# EAGLE board P2H-001 (EAGLE 7.1.0)
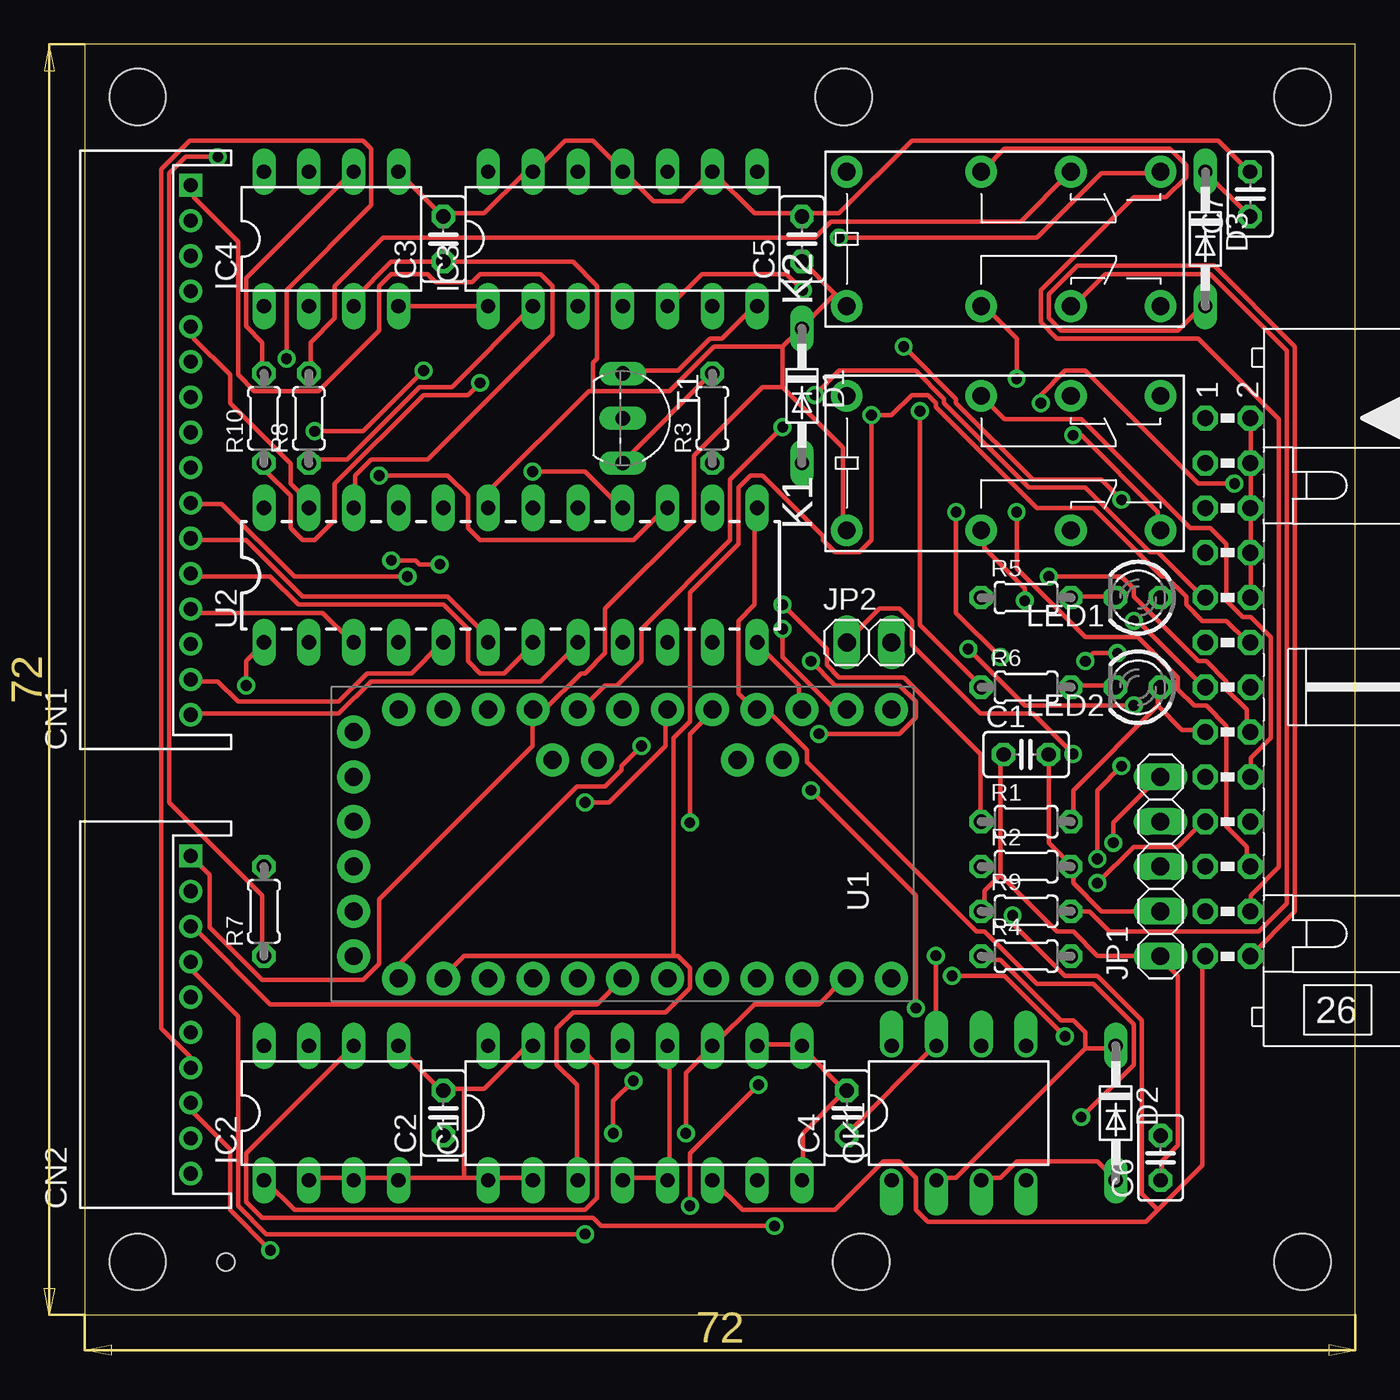
[diagram p0: board, top side]
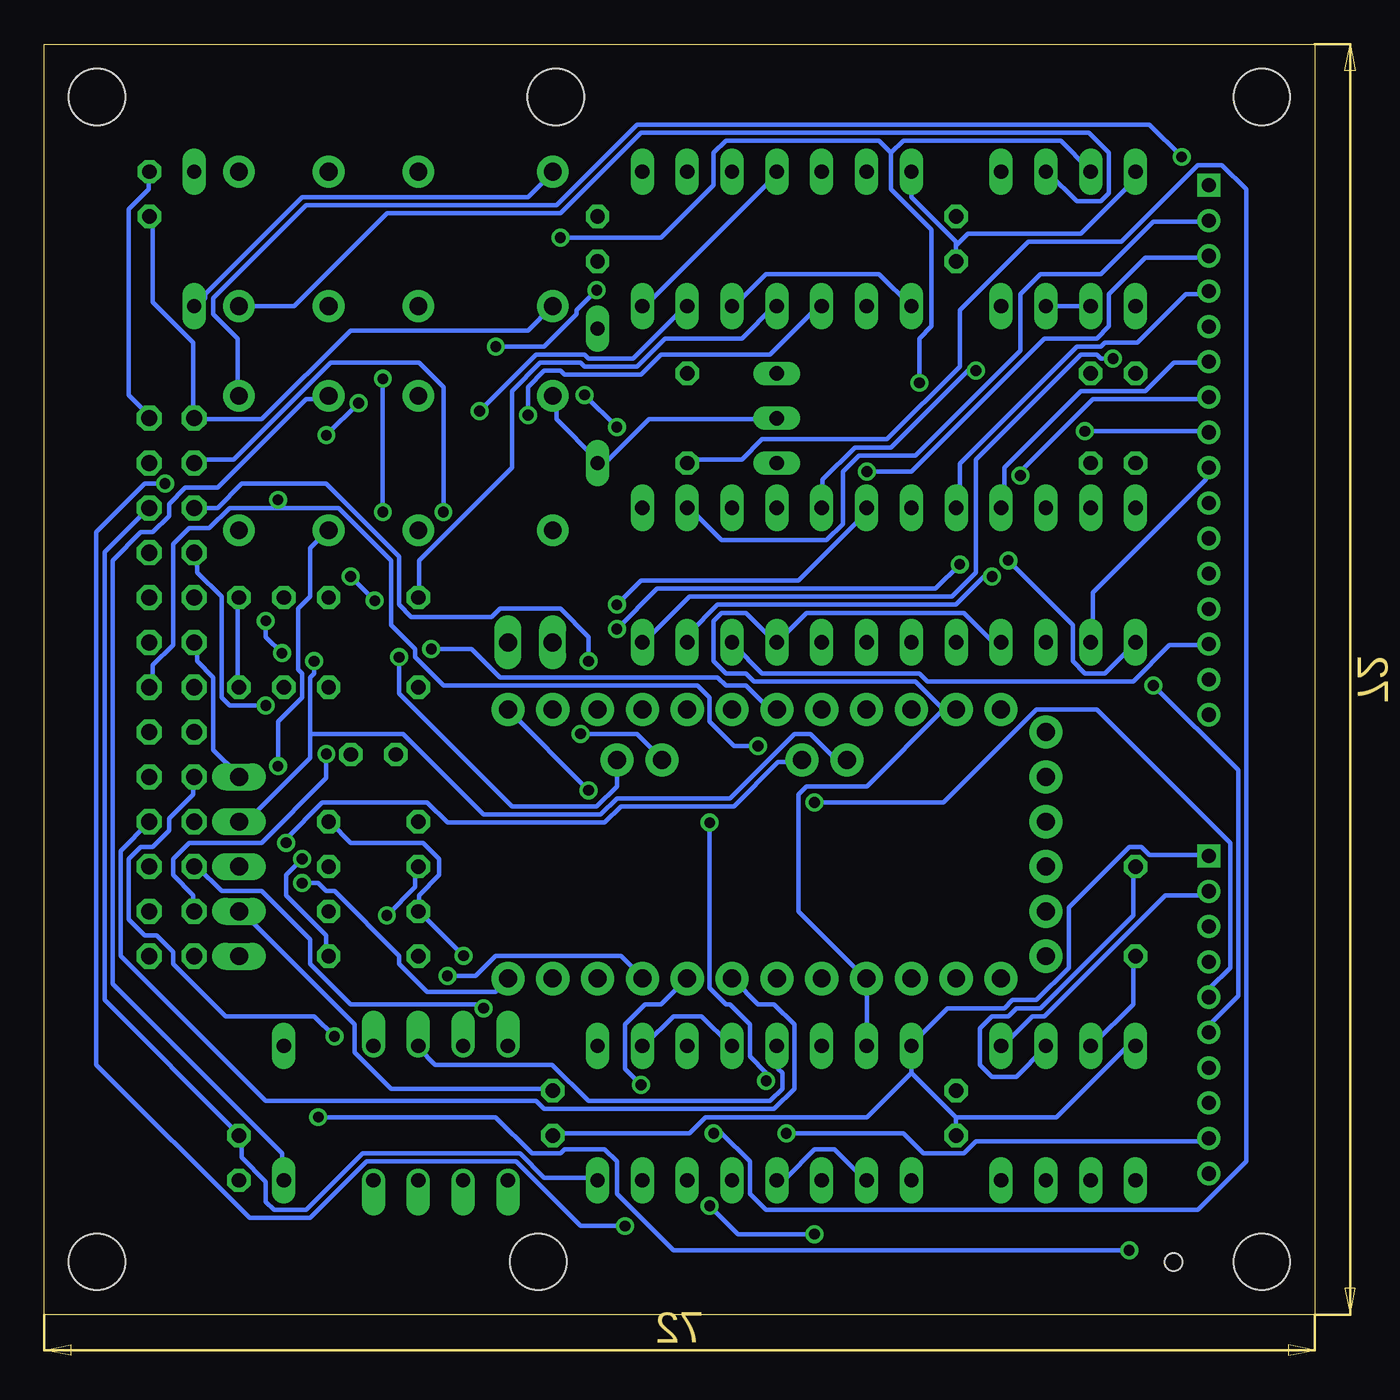
[diagram p1: board, bottom side, seen from below]

Size 72 x 72 mm. Coordinates in mm from the lower left corner, seen from the top.
Outline: 0,0 72,0 72,72 0,72 0,0
Copper layers (1*16): Top 0.035mm / dielectric 1.5mm / Bottom 0.035mm
Design rules "default": minimum track width 10mil, minimum drill 24mil, track to track 8mil, track to pad 8mil, pad to pad 8mil, via to via 8mil, smd to smd 8mil, copper to edge 40mil, drill to drill 8mil, minimum pad ring 10mil, minimum via ring 8mil, stop-mask expansion 4mil, vias tented up to drill 0mil, thermal gap 10mil
Holes 3.2 mm at 3,3 3,69 69,3 69,69 44,3 43,69
Holes 1 mm at 8,3

## Footprints (pad centres in the part's own frame; a part is rotated, then mirrored left to right if it is on the bottom)
C025-025X050 = drill 0.813 octagon: 1 -1.27,0; 2 1.27,0
S16B-PH-K-S = drill 0.8 square: 1 15,0 | drill 0.8: 2 13,0; 3 11,0; 4 9,0; 5 7,0; 6 5,0; 7 3,0; 8 1,0; 9 -1,0; 10 -3,0; 11 -5,0; 12 -7,0; 13 -9,0; 14 -11,0; 15 -13,0; 16 -15,0
S10B-PH-K-S = drill 0.8 square: 1 9,0 | drill 0.8: 2 7,0; 3 5,0; 4 3,0; 5 1,0; 6 -1,0; 7 -3,0; 8 -5,0; 9 -7,0; 10 -9,0
DO34-7 = drill 0.813 long: A 3.81,0; C -3.81,0
DIL16 = drill 0.813 long: 1 -8.89,-3.81; 2 -6.35,-3.81; 3 -3.81,-3.81; 4 -1.27,-3.81; 5 1.27,-3.81; 6 3.81,-3.81; 7 6.35,-3.81; 8 8.89,-3.81; 9 8.89,3.81; 10 6.35,3.81; 11 3.81,3.81; 12 1.27,3.81; 13 -1.27,3.81; 14 -3.81,3.81; 15 -6.35,3.81; 16 -8.89,3.81
DIL08 = drill 0.813 long: 1 -3.81,-3.81; 2 -1.27,-3.81; 3 1.27,-3.81; 4 3.81,-3.81; 5 3.81,3.81; 6 1.27,3.81; 7 -1.27,3.81; 8 -3.81,3.81
DIL14 = drill 0.813 long: 1 -7.62,-3.81; 2 -5.08,-3.81; 3 -2.54,-3.81; 4 0,-3.81; 5 2.54,-3.81; 6 5.08,-3.81; 7 7.62,-3.81; 8 7.62,3.81; 9 5.08,3.81; 10 2.54,3.81; 11 0,3.81; 12 -2.54,3.81; 13 -5.08,3.81; 14 -7.62,3.81
1X05 = drill 1.016 long: 1 -5.08,0; 2 -2.54,0; 3 0,0; 4 2.54,0; 5 5.08,0
1X02 = drill 1.016 long: 1 -1.27,0; 2 1.27,0
G5V-2 = drill 1 pad 1.8: 1 -8.89,-3.81; 4 -1.27,-3.81; 6 3.81,-3.81; 8 8.89,-3.81; 9 8.89,3.81; 11 3.81,3.81; 13 -1.27,3.81; 16 -8.89,3.81
LED3MM = drill 0.813 octagon: A -1.27,0; K 1.27,0
DIL08' = drill 0.813 offset: 1 -3.81,-3.81; 2 -1.27,-3.81; 3 1.27,-3.81; 4 3.81,-3.81; 5 3.81,3.81; 6 1.27,3.81; 7 -1.27,3.81; 8 -3.81,3.81
0204/5 = drill 0.813 octagon: 1 -2.54,0; 2 2.54,0
ML26L = drill 0.914 octagon: 1 -15.24,-1.27; 2 -15.24,1.27; 3 -12.7,-1.27; 4 -12.7,1.27; 5 -10.16,-1.27; 6 -10.16,1.27; 7 -7.62,-1.27; 8 -7.62,1.27; 9 -5.08,-1.27; 10 -5.08,1.27; 11 -2.54,-1.27; 12 -2.54,1.27; 13 0,-1.27; 14 0,1.27; 15 2.54,-1.27; 16 2.54,1.27; 17 5.08,-1.27; 18 5.08,1.27; 19 7.62,-1.27; 20 7.62,1.27; 21 10.16,-1.27; 22 10.16,1.27; 23 12.7,-1.27; 24 12.7,1.27; 25 15.24,-1.27; 26 15.24,1.27
TO92-ECB = drill 0.813 long: B 2.54,0; C 0,0; E -2.54,0
ARDUINO_PRO_MINI = drill 1.016 pad 1.88: 1 -7.62,12.7; 2 -7.62,10.16; 3 -7.62,7.62; 4 -7.62,5.08; 5 -7.62,2.54; 6 -7.62,0; 7 -7.62,-2.54; 8 -7.62,-5.08; 9 -7.62,-7.62; 10 -7.62,-10.16; 11 -7.62,-12.7; 12 -7.62,-15.24; 13 7.62,-15.24; 14 7.62,-12.7; 15 7.62,-10.16; 16 7.62,-7.62; 17 7.62,-5.08; 18 7.62,-2.54; 19 7.62,0; 20 7.62,2.54; 21 7.62,5.08; 22 7.62,7.62; 23 7.62,10.16; 24 7.62,12.7; A4 4.763,1.429; A5 4.763,3.969; A6 4.763,-9.049; A7 4.763,-6.509; BLK -6.35,15.24; GND -3.81,15.24; GRN 6.35,15.24; RXI 1.27,15.24; TXO 3.81,15.24; VCC -1.27,15.24
DIL24 = drill 0.813 long: 1 -13.97,-3.81; 2 -11.43,-3.81; 3 -8.89,-3.81; 4 -6.35,-3.81; 5 -3.81,-3.81; 6 -1.27,-3.81; 7 1.27,-3.81; 8 3.81,-3.81; 9 6.35,-3.81; 10 8.89,-3.81; 11 11.43,-3.81; 12 13.97,-3.81; 13 13.97,3.81; 14 11.43,3.81; 15 8.89,3.81; 16 6.35,3.81; 17 3.81,3.81; 18 1.27,3.81; 19 -1.27,3.81; 20 -3.81,3.81; 21 -6.35,3.81; 22 -8.89,3.81; 23 -11.43,3.81; 24 -13.97,3.81

## Placement (x,y rotation side)
C1  104  [C025-025X050]  53.34,31.75 0 top
C2  103  [C025-025X050]  20.32,11.43 90 top
C3  103  [C025-025X050]  20.32,60.96 90 top
C4  103  [C025-025X050]  43.18,11.43 90 top
C5  103  [C025-025X050]  40.64,60.96 90 top
C6  103  [C025-025X050]  60.96,8.89 90 top
C7  103  [C025-025X050]  66.04,63.5 90 top
CN1  [S16B-PH-K-S]  6,49 90 top
CN2  [S10B-PH-K-S]  6,17 90 top
D1  BAS15  [DO34-7]  40.64,52.07 270 top
D2  BAS15  [DO34-7]  58.42,11.43 270 top
D3  BAS15  [DO34-7]  63.5,60.96 270 top
IC1  4051N  [DIL16]  31.75,11.43 0 top
IC2  LTC485N  [DIL08]  13.97,11.43 0 top
IC3  74LS07N  [DIL14]  30.48,60.96 0 top
IC4  LTC485N  [DIL08]  13.97,60.96 0 top
JP1  [1X05]  60.96,25.4 90 top
JP2  [1X02]  44.45,38.1 0 top
K1  G5V-2  [G5V-2]  52.07,48.26 0 top
K2  G5V-2  [G5V-2]  52.07,60.96 0 top
LED1  RED  [LED3MM]  59.69,40.64 180 top
LED2  GRN  [LED3MM]  59.69,35.56 180 top
OK1  6N137  [DIL08']  49.53,11.43 0 top
R1  22k  [0204/5]  53.34,27.94 0 top
R2  10k  [0204/5]  53.34,25.4 0 top
R3  3.3k  [0204/5]  35.56,50.8 90 top
R4  220  [0204/5]  53.34,20.32 0 top
R5  330  [0204/5]  53.34,40.64 0 top
R6  330  [0204/5]  53.34,35.56 0 top
R7  120  [0204/5]  10.16,22.86 90 top
R8  220  [0204/5]  12.7,50.8 90 top
R9  220  [0204/5]  53.34,22.86 0 top
R10  120  [0204/5]  10.16,50.8 90 top
SV1  [ML26L]  64.77,35.56 270 top
T1  2SC1815  [TO92-ECB]  30.48,50.8 270 top
U1  ARDUINO_PRO_MINI  [ARDUINO_PRO_MINI]  30.48,26.67 90 top
U2  MAX7219DIP  [DIL24]  24.13,41.91 0 top

## Library data of the parts
C1-C7 = rcl
CN1 CN2 = jst-ph
D1-D3 = diode
IC1 = 40xx
IC2 IC4 = linear-technology; OC_FARNELL: unknown; OC_NEWARK: unknown
IC3 = 74xx-us
JP1 JP2 = pinhead
K1 K2 = relay; MPN: G5V-2 5DC; OC_FARNELL: 9949488; OC_NEWARK: 78K5703
LED1 LED2 = led
OK1 = optocoupler; MPN: 6N137; OC_FARNELL: 1328376; OC_NEWARK: 52M1895
R1-R10 = resistor
SV1 = con-ml; OC_FARNELL: unknown; OC_NEWARK: unknown
T1 = transistor
U1 = SparkFun-Boards
U2 = SparkFun-DigitalIC

## Nets
CTRL0: JP2.1 SV1.23
CTRL1: IC1.6 R2.1 SV1.25
CTRL2: CN2.3 U1.6
CTRL3: CN2.4 U1.8
CTRL4: CN2.5 U1.18
CTRL5: CN2.6 U1.14 U2.1
CTRL6: CN2.7 U1.15 U2.12
CTRL7: CN2.8 U1.16 U2.13
CTRL8: CN2.9 U1.17
CTRL9: IC1.11 R3.1 U1.11
CTRL10: U1.3
GEEK0: SV1.3 U1.A6
GEEK1: SV1.5 U1.A7
GEEK2: SV1.7 U1.19
GEEK3: SV1.9 U1.20
GEEK4: JP1.5 SV1.11 U1.A4
GEEK5: JP1.4 SV1.13 U1.A5
GEEK6: SV1.17 U1.9
GEEK7: SV1.19 U1.12
GEEK8: SV1.21 U1.13
GND: C1.2 C2.2 C3.2 C4.2 C5.2 C6.2 C7.2 CN2.2 IC1.1 IC1.2 IC1.4 IC1.5 IC1.8 IC1.9 IC1.10 IC1.12 IC1.15 IC2.2 IC2.3 IC2.4 IC2.5 IC3.7 IC3.9 IC3.11 IC3.13 IC4.5 JP1.2 R2.2 SV1.2 SV1.4 SV1.6 SV1.8 SV1.10 T1.E U1.4 U1.23 U2.4 U2.9
LDIG0: CN1.9 U2.2
LDIG1: CN1.10 U2.11
LDIG2: CN1.11 U2.6
LDIG3: CN1.12 U2.7
LDIG4: CN1.13 U2.3
LDIG5: CN1.14 U2.10
LDIG6: CN1.15 U2.5
LDIG7: CN1.16 U2.8
LSEG0: CN1.1 U2.22
LSEG1: CN1.2 U2.14
LSEG2: CN1.3 U2.16
LSEG3: CN1.4 U2.20
LSEG4: CN1.5 U2.23
LSEG5: CN1.6 U2.21
LSEG6: CN1.7 U2.15
LSEG7: CN1.8 U2.17
MIDI0: IC1.3 IC3.3 SV1.12 U1.2
MIDI1: IC3.1 IC3.5 IC4.4 SV1.14 U1.1
MIDI2: K1.4 SV1.16
MIDI3: K1.13 SV1.18
MIDI4: SV1.20 U1.7
MIDI5: K2.4 SV1.22
MIDI6: K2.13 SV1.24
MIDI7: D3.A K2.16 SV1.26
MIDIRX: IC1.13 OK1.6
N$1: R3.2 T1.B
N$2: IC3.2 R8.1
N$3: IC3.4 R5.1
N$4: IC3.6 R6.1
N$5: LED1.K R5.2
N$6: LED2.K R6.2
N$11: D1.A K1.16 T1.C
N$13: D2.C OK1.2 R4.1
N$21: R1.1 U2.18
RX+: IC2.6 K1.8 R7.2
RX-: IC2.7 K1.9 R7.1
RXA: K1.6 R4.2
RXK: D2.A K1.11 OK1.3
TX+: IC4.6 K2.8 R10.2
TX-: IC4.7 K2.9 R10.1
TXSNK: K2.11 R8.2
TXSRC: K2.6 R9.2
VCC: C1.1 C2.1 C3.1 C4.1 C5.1 C6.1 C7.1 CN2.1 D1.C D3.C IC1.16 IC2.8 IC3.14 IC4.2 IC4.3 IC4.8 JP1.1 K1.1 K2.1 LED1.A LED2.A OK1.7 R1.2 R9.1 SV1.1 SV1.15 U1.21 U2.19
VEE: IC1.7
XMIDIRX: IC1.14 IC2.1

## Tracks (layer width: path | path; a pad name or v marks a point on that pad's centre or on a via)
CTRL0  (via drill 0.61)
  Top 0.254: v56.01,31.77 53.72,34.06 50.75,34.06 46.86,37.95 46.86,39.32 46.18,40.01 45.03,40.01 43.2,38.18 JP2.1
  Bottom 0.254: v56.01,31.77 56.01,30.4 59.66,26.75 63.78,26.75 64.69,25.83 64.69,24.92 63.55,23.77 63.55,22.86 SV1.23
CTRL1  (via drill 0.61)
  Top 0.254: 60.81,5.94 63.32,8.46 63.32,20.12 SV1.25 | 60.81,5.94 60.12,5.26 47.78,5.26 47.09,5.94 47.09,7.77 46.18,8.69 45.26,8.69 42.52,5.94 37.26,5.94 35.66,7.54 IC1.6 | v52.58,22.63 52.58,22.17 55.55,19.2 57.38,19.2 59.89,16.69 59.89,6.86 60.81,5.94
  Bottom 0.254: v52.58,22.63 50.98,24.23 50.98,25.38 R2.1
CTRL2
  Top 0.254: U1.6 29.03,17.6 10.52,17.6 6.17,21.95 CN2.3
CTRL3  (via drill 0.61)
  Top 0.254: v28.35,4.57 10.29,4.57 8.69,6.17 8.69,16.92 6.17,19.43 6.17,19.89 CN2.4 | v34.29,6.17 34.29,9.14 v38.18,13.03
  Bottom 0.254: v28.35,4.57 32.69,4.57 v34.29,6.17 | v38.18,13.03 39.09,13.95 39.09,16.46 37.95,17.6 37.03,17.6 35.66,18.97 U1.8
CTRL4  (via drill 0.61)
  Top 0.254: v28.35,29.03 29.72,29.03 32.92,32.23 32.92,34.29 U1.18
  Bottom 0.254: v28.35,29.03 21.03,29.03 15.77,34.29 12.34,34.29 4.8,26.75 4.8,19.66 5.94,18.52 5.94,18.06 CN2.5
CTRL5  (via drill 0.61)
  Top 0.254: v9.14,35.66 9.14,37.03 10.06,37.95 U2.1 | U1.14 42.52,34.29 39.55,37.26 v39.55,38.86 | v20.12,42.52 18.97,42.52 18.75,42.75 v17.37,42.75
  Bottom 0.254: v9.14,35.66 4.34,30.86 4.34,18.06 5.94,16.46 5.94,16 CN2.6 | v39.55,38.86 37.26,41.15 21.49,41.15 v20.12,42.52 | v17.37,42.75 13.72,39.09 13.72,37.03 13.03,36.35 11.89,36.35 10.29,37.95 U2.1
CTRL6  (via drill 0.61)
  Top 0.254: v11.43,54.18 11.43,58.06 16.23,62.87 16.23,66.06 15.77,66.52 5.94,66.52 4.34,64.92 4.34,16.23 5.94,14.63 5.94,14.17 CN2.7 | U1.15 40.46,34.29 40.46,35.66 38.18,37.95 U2.12
  Bottom 0.254: v11.43,54.18 12.12,54.18 12.34,54.41 13.26,54.41 19.2,48.46 19.2,42.06 20.57,40.69 35.43,40.69 37.95,38.18 U2.12
CTRL7  (via drill 0.61)
  Top 0.254: v10.52,3.66 8.23,5.94 8.23,9.37 6.17,11.43 6.17,11.89 CN2.8 | v56.46,11.2 59.44,14.17 59.44,16.46 57.15,18.75 53.95,18.75 50.98,21.72 50.52,21.72 40.92,31.32 40.92,32 38.63,34.29 U1.16 37.95,34.29 37.03,35.2 37.03,39.32 37.95,40.23 37.95,45.72 U2.13
  Bottom 0.254: v10.52,3.66 36.35,3.66 39.55,6.86 39.55,8.69 40.23,9.37 42.52,9.37 42.75,9.14 44.35,9.14 46.41,11.2 v56.46,11.2
CTRL8  (via drill 0.61)
  Top 0.254: v29.95,10.29 29.95,12.12 v31.09,13.26 | v34.29,27.89 34.29,32.92 35.66,34.29 U1.17
  Bottom 0.254: v29.95,10.29 23.32,10.29 22.17,9.14 19.89,9.14 19.2,9.83 6.17,9.83 CN2.9 | v31.09,13.26 31.09,13.72 32,14.63 32,16.46 33.15,17.6 33.38,17.6 34.29,18.52 v34.29,27.89
CTRL9  (via drill 0.61)
  Top 0.254: U1.11 42.98,18.97 41.6,17.6 37.95,17.6 35.66,15.32 IC1.11 35.43,15.09 34.06,13.72 v34.06,10.29
  Bottom 0.254: v34.06,10.29 33.6,10.29 32,8.69 32,6.86 31.09,5.94 6.63,5.94 3.89,8.69 3.89,63.78 5.26,65.15 6.63,65.15 10.97,60.81 16.23,60.81 20.12,56.92 20.12,53.72 24.23,49.61 31.32,49.61 32.46,48.46 35.43,48.46 R3.1
GEEK0  (via drill 0.61)
  Top 0.254: v49.38,45.49 49.38,39.78 v51.89,37.26
  Bottom 0.254: v49.38,45.49 49.38,52.58 50.75,53.95 55.78,53.95 61.27,48.46 63.32,48.46 SV1.3 | v51.89,37.26 51.89,35.2 45.49,28.8 40.69,28.8 39.55,29.95 39.55,31.32 U1.A6
GEEK1  (via drill 0.61)
  Top 0.254: v41.15,37.03 42.52,35.66 46.18,35.66 47.09,34.75 47.09,33.83 46.18,32.92 v41.6,32.92
  Bottom 0.254: SV1.5 62.18,45.72 60.81,47.09 56.01,47.09 51.89,42.98 51.89,40.23 51.21,39.55 46.63,39.55 46.18,40.01 42.75,40.01 41.15,38.41 v41.15,37.03 | v41.6,32.92 38.41,32.92 37.03,31.55 U1.A7
GEEK2  (via drill 0.61)
  Top 0.254: v59.44,34.52 53.26,34.52 v50.06,37.72
  Bottom 0.254: v59.44,34.52 61.49,34.52 61.95,34.98 61.95,40.69 63.32,42.06 63.32,42.98 SV1.7 | v50.06,37.72 47.78,37.72 46.18,36.12 33.83,36.12 33.38,35.66 32.23,35.66 30.86,34.29 U1.19
GEEK3  (via drill 0.61)
  Top 0.254: v41.38,52.12 42.75,53.49 47.09,53.49 48.69,51.89 48.69,51.66 53.49,46.86 56.69,46.86 60.35,43.2 60.81,43.2 63.32,40.69 SV1.9 | v39.55,50.29 36.58,47.32 36.58,43.89 31.55,38.86 31.55,37.03 30.18,35.66 29.49,35.66 28.12,34.29 U1.20
  Bottom 0.254: v39.55,50.29 v41.38,52.12
GEEK4  (via drill 0.61)
  Top 0.254: v58.29,26.75 58.29,27.89 60.81,30.4 JP1.5
  Bottom 0.254: SV1.11 63.32,37.95 63.32,37.03 62.41,36.12 62.41,32 61.04,30.63 JP1.5 | v58.29,26.75 58.29,26.98 56.24,29.03 50.29,29.03 49.15,27.89 40.23,27.89 39.32,28.8 32.92,28.8 30.4,31.32 29.26,31.32 U1.A4
GEEK5  (via drill 0.61)
  Top 0.254: v59.44,39.32 59.66,39.32 63.32,35.66 SV1.13 | v58.52,37.49 57.15,37.49 v56.69,37.03
  Bottom 0.254: v59.44,39.32 59.44,38.41 v58.52,37.49 | v56.69,37.03 56.69,36.35 56.92,36.12 56.92,32.92 | 56.92,32.92 56.92,31.55 60.35,28.12 60.81,28.12 JP1.4 | 56.92,32.92 51.66,32.92 47.09,28.35 40.46,28.35 39.55,29.26 33.15,29.26 29.49,32.92 28.57,32.92 27.2,31.55 26.52,31.55 U1.A5
GEEK6  (via drill 0.61)
  Top 0.254: v55.55,15.77 52.12,19.2 v49.15,19.2
  Bottom 0.254: v55.55,15.77 56.69,16.92 61.72,16.92 64.69,19.89 64.69,20.57 65.61,21.49 66.29,21.49 67.21,22.4 67.21,25.83 66.52,26.52 65.84,26.52 64.92,27.43 64.92,28.12 63.55,29.49 63.55,30.4 SV1.17 | v49.15,19.2 47.55,19.2 46.41,20.34 39.32,20.34 38.18,19.2 U1.9
GEEK7  (via drill 0.61)
  Top 0.254: v57.38,24.46 59.44,26.52 61.95,26.52 63.32,27.89 SV1.19
  Bottom 0.254: v57.38,24.46 56.46,24.46 56.01,24 55.55,24 51.89,20.34 51.89,19.89 50.29,18.29 46.41,18.29 45.72,18.97 U1.12
GEEK8  (via drill 0.61)
  Top 0.254: v47.09,17.37 47.09,23.77 v41.15,29.72
  Bottom 0.254: v47.09,17.37 47.32,17.6 54.63,17.6 56.92,19.89 56.92,21.26 59.66,24 61.95,24 63.32,25.38 SV1.21 | U1.13 v41.15,29.72
GND
  Top 0.254: SV1.10 66.06,40.69 66.06,42.98 SV1.8 66.06,43.2 66.06,45.72 | 66.06,45.72 66.06,48.23 SV1.4 66.06,48.46 66.06,50.75 SV1.2 | 66.06,45.72 SV1.6 | T1.E 30.63,53.49 33.6,53.49 35.43,55.32 36.12,55.32 37.95,57.15 IC3.7 | IC4.5 17.83,64.69 20.12,62.41 C3.2 20.34,62.41 22.63,62.41 24.92,64.69 25.38,64.69 IC3.13 25.6,64.92 27.2,66.52 28.8,66.52 30.4,64.92 IC3.11 30.63,64.69 32.23,63.09 33.83,63.09 35.43,64.69 IC3.9 35.66,64.69 37.95,62.41 40.46,62.41 C5.2 40.69,62.41 42.75,62.41 46.86,66.52 64.24,66.52 65.84,64.92 C7.2 | JP1.2 57.61,22.86 56.01,24.46 56.01,25.38 R2.2 55.78,25.6 54.63,26.75 54.63,31.55 C1.2 | IC1.10 38.18,15.32 40.46,15.32 IC1.9 40.69,15.09 42.98,12.8 C4.2 42.98,12.57 40.69,10.29 40.69,7.77 IC1.8 | IC1.4 30.63,7.77 32.92,7.77 IC1.5 33.15,7.77 33.15,15.09 IC1.12 | 22.86,7.77 25.38,7.77 IC1.2 | IC2.2 12.8,7.77 15.09,7.77 IC2.3 15.32,7.77 17.6,7.77 IC2.4 17.83,7.77 21.49,7.77 | 21.49,7.77 22.86,7.77 | 22.86,7.77 IC1.1 | IC2.5 17.83,15.09 20.12,12.8 C2.2 20.34,12.8 21.49,12.8 | 21.49,12.8 22.63,12.8 24.92,15.09 25.38,15.09 IC1.15 | 21.49,12.8 21.49,7.77
  Bottom 0.254: C7.2 66.06,64.69 66.06,63.78 67.21,62.64 67.21,52.12 66.06,50.98 SV1.2 | IC3.7 37.95,57.15 30.4,64.69 IC3.11 | IC1.12 33.15,15.32 34.75,16.92 36.35,16.92 37.95,15.32 IC1.10 | IC1.8 40.69,7.77 43.66,7.77 45.03,9.14 53.95,9.14 57.15,5.94 58.98,5.94 59.44,6.4 59.44,7.54 60.81,8.91 60.81,10.06 C6.2 61.04,10.29 68.58,17.83 68.58,43.2 66.06,45.72 SV1.6 | JP1.2 60.81,22.86 54.41,16.46 54.41,14.86 52.35,12.8 43.2,12.8 C4.2 | IC1.4 30.4,7.77 29.95,7.77 28.35,9.37 27.2,9.37 25.6,7.77 IC1.2 | U2.4 17.83,38.18 18.29,38.18 19.89,39.78 28.8,39.78 U2.9 30.63,38.18 32.23,39.78 33.6,39.78 34.06,39.32 34.06,37.03 33.38,36.35 32.23,36.35 31.77,35.89 22.63,35.89 21.03,34.29 | 21.03,34.29 U1.23 20.34,34.29 | IC1.15 25.38,15.32 25.38,18.97 U1.4 25.6,19.2 29.26,22.86 29.26,29.49 28.8,29.95 25.38,29.95 21.03,34.29 | CN2.2 6.17,23.77 8.46,23.77 15.32,16.92 16,16.92 17.6,15.32 IC2.5
LDIG0
  Bottom 0.254: CN1.9 6.17,47.78 6.17,47.32 12.57,40.92 12.57,38.18 U2.2
LDIG1  (via drill 0.61)
  Top 0.254: v18.29,41.83 11.89,41.83 7.77,45.95 6.17,45.95 CN1.10
  Bottom 0.254: v18.29,41.83 18.75,41.83 20.34,40.23 33.83,40.23 35.43,38.63 35.43,38.18 U2.11
LDIG2
  Top 0.254: U2.6 22.86,38.41 20.57,40.69 12.34,40.69 9.14,43.89 6.17,43.89 CN1.11
LDIG3
  Top 0.254: CN1.12 6.17,41.83 10.52,41.83 12.12,40.23 20.34,40.23 21.72,38.86 21.72,37.03 22.4,36.35 23.77,36.35 25.38,37.95 U2.7
LDIG4
  Top 0.254: CN1.13 6.17,39.78 13.49,39.78 15.09,38.18 U2.3
LDIG5
  Bottom 0.254: CN1.14 6.17,37.95 8.23,37.95 10.29,35.89 21.95,35.89 22.4,36.35 31.32,36.35 32.92,37.95 U2.10
LDIG6
  Top 0.254: CN1.15 6.17,35.89 7.54,35.89 8.69,34.75 14.4,34.75 16,36.35 18.52,36.35 20.12,37.95 U2.5
LDIG7
  Top 0.254: CN1.16 6.17,34.06 14.4,34.06 16.23,35.89 25.83,35.89 27.89,37.95 U2.8
LSEG0
  Top 0.254: CN1.1 6.17,63.78 6.17,63.32 8.69,60.81 8.69,53.26 9.6,52.35 13.26,52.35 16.69,55.78 16.69,58.29 17.37,58.98 19.43,58.98 19.89,58.52 21.95,58.52 22.4,58.98 25.83,58.98 26.52,58.29 26.52,55.55 19.43,48.46 16.23,48.46 15.32,47.55 15.32,45.72 U2.22
LSEG1
  Bottom 0.254: CN1.2 6.17,61.95 9.14,61.95 12.12,58.98 15.54,58.98 16.69,57.84 16.69,54.63 22.63,48.69 25.83,48.69 26.75,47.78 26.75,44.81 27.66,43.89 33.6,43.89 35.43,45.72 U2.14
LSEG2  (via drill 0.61)
  Top 0.254: v25.38,47.78 28.35,47.78 30.4,45.72 U2.16
  Bottom 0.254: v25.38,47.78 22.86,47.78 15.32,55.32 12.34,55.32 11.66,56.01 11.66,57.84 9.6,59.89 6.17,59.89 CN1.3
LSEG3
  Bottom 0.254: CN1.4 6.17,57.84 7.32,57.84 10.06,55.09 11.89,55.09 12.12,54.86 13.49,54.86 20.12,48.23 20.12,45.72 U2.20
LSEG4
  Top 0.254: CN1.5 6.17,55.78 6.17,55.32 8.23,53.26 8.23,51.66 11.66,48.23 11.66,47.09 12.57,46.18 12.57,45.72 U2.23
LSEG5
  Bottom 0.254: CN1.6 6.17,53.95 8,53.95 9.6,52.35 13.26,52.35 17.6,48.01 17.6,45.72 U2.21
LSEG6  (via drill 0.61)
  Top 0.254: v16.69,47.55 20.57,47.55 21.72,46.41 21.72,44.58 22.4,43.89 31.09,43.89 32.92,45.72 U2.15
  Bottom 0.254: v16.69,47.55 16.69,47.78 12.57,51.89 6.17,51.89 CN1.7
LSEG7  (via drill 0.61)
  Top 0.254: v13.03,50.06 15.77,50.06 v19.2,53.49
  Bottom 0.254: v13.03,50.06 6.17,50.06 CN1.8 | v19.2,53.49 19.66,53.49 24,49.15 26.06,49.15 27.89,47.32 27.89,45.72 U2.17
MIDI0  (via drill 0.61)
  Top 0.254: 33.38,20.34 21.49,20.34 20.34,19.2 U1.2 | 33.38,20.34 33.6,20.34 34.29,19.66 34.29,18.52 32.92,17.14 27.66,17.14 26.75,16.23 26.75,14.17 27.89,13.03 27.89,7.77 IC1.3 | SV1.12 65.84,38.18 64.69,39.32 63.32,39.32 62.41,40.23 62.41,40.69 61.27,41.83 61.04,41.83 57.15,45.72 53.95,45.72 48.23,51.44 48.23,51.66 47.78,52.12 46.86,52.12 45.72,50.98 v44.58,50.98 44.58,43.89 43.89,43.2 42.52,43.2 41.83,43.89 41.83,44.12 38.41,47.55 37.72,47.55 37.03,46.86 37.03,43.66 34.29,40.92 34.29,33.6 33.38,32.69 33.38,20.34
  Bottom 0.254: v44.58,50.98 44.58,52.58 43.66,53.49 42.75,53.49 42.52,53.26 38.18,53.26 37.03,54.41 30.86,54.41 28.12,57.15 IC3.3
MIDI1  (via drill 0.61)
  Top 0.254: IC3.1 IC4.4 | v31.55,32.23 30.4,31.09 30.4,30.86 29.49,29.95 27.89,29.95 17.83,19.89 17.83,19.2 U1.1 | v40.69,58.06 39.78,58.98 34.98,58.98 33.15,57.15 IC3.5 | v46.41,54.86 49.38,51.89 49.38,51.66 53.72,47.32 57.61,47.32 v58.75,46.18
  Bottom 0.254: IC3.1 24.69,58.98 31.09,58.98 32.92,57.15 IC3.5 | 58.75,45.72 55.32,45.72 52.35,42.75 52.35,39.09 50.98,37.72 50.98,37.26 49.38,35.66 34.98,35.66 34.29,34.98 34.29,33.6 32.92,32.23 v31.55,32.23 | 58.75,45.72 61.49,45.72 62.64,44.58 63.78,44.58 64.69,43.66 64.69,37.95 65.84,36.8 65.84,35.66 SV1.14 | v40.69,58.06 41.83,56.92 41.83,56.69 43.66,54.86 v46.41,54.86 | 58.75,45.72 v58.75,46.18
MIDI2  (via drill 0.61)
  Top 0.254: v54.63,41.83 58.75,41.83 59.44,41.15 59.44,40.69 63.09,37.03 63.55,37.03 64.69,35.89 64.69,35.43 65.84,34.29 65.84,33.15 SV1.16 | v53.26,40.46 53.26,41.15 50.98,43.43 50.98,44.35 K1.4
  Bottom 0.254: v53.26,40.46 v54.63,41.83
MIDI3
  Top 0.254: K1.13 52.12,50.75 56.46,50.75 62.64,44.58 63.78,44.58 64.69,43.66 64.69,40.46 65.61,39.55 66.06,39.55 67.21,38.41 67.21,32.69 66.06,31.55 66.06,30.63 SV1.18
MIDI4
  Bottom 0.254: SV1.20 66.06,27.89 67.67,26.29 67.67,20.34 59.44,12.12 44.12,12.12 43.66,11.66 30.63,11.66 29.49,12.8 29.49,16.46 30.63,17.6 31.55,17.6 32.92,18.97 U1.7
MIDI5  (via drill 0.61)
  Top 0.254: v52.81,45.49 52.81,42.29 56.69,38.41 59.66,38.41 61.95,36.12 61.95,35.43 62.87,34.52 63.55,34.52 64.69,33.38 64.69,27.66 65.84,26.52 65.84,25.6 SV1.22 | v52.81,53.03 52.81,55.32 50.98,57.15 K2.4
  Bottom 0.254: v52.81,53.03 v52.81,45.49
MIDI6
  Top 0.254: SV1.24 66.06,22.86 66.06,23.77 67.67,25.38 67.67,50.75 63.09,55.32 55.09,55.32 54.18,56.24 54.18,58.06 59.44,63.32 61.27,63.32 62.41,64.47 62.41,65.15 61.49,66.06 52.12,66.06 50.98,64.92 K2.13
MIDI7
  Top 0.254: SV1.26 68.58,22.86 68.58,54.86 64.01,59.44 56.24,59.44 54.63,57.84 54.63,56.46 55.32,55.78 61.95,55.78 63.32,57.15 D3.A
  Bottom 0.254: D3.A 63.32,57.15 62.87,57.61 62.87,57.84 57.38,63.32 44.58,63.32 43.2,64.69 K2.16
MIDIRX
  Bottom 0.254: IC1.13 30.4,15.09 30.4,13.95 30.18,13.72 30.18,12.8 30.86,12.12 41.15,12.12 43.2,14.17 49.84,14.17 50.75,15.09 OK1.6
N$1
  Top 0.254: T1.B 30.63,48.46 35.43,53.26 R3.2
N$2
  Top 0.254: R8.1 12.8,48.46 14.86,48.46 18.97,52.58 20.8,52.58 25.38,57.15 IC3.2
N$3
  Bottom 0.254: R5.1 50.75,40.69 50.75,42.75 45.49,48.01 45.49,52.35 43.89,53.95 41.6,53.95 41.38,53.72 38.41,53.72 36.8,55.32 32.46,55.32 30.63,57.15 IC3.4
N$4  (via drill 0.61)
  Top 0.254: v47.32,51.21 47.32,39.09 50.75,35.66 R6.1
  Bottom 0.254: v47.32,51.21 44.12,54.41 41.38,54.41 41.15,54.18 38.63,54.18 35.66,57.15 IC3.6
N$5
  Top 0.254: R5.2 56.01,40.69 58.29,40.69 LED1.K
N$6
  Top 0.254: R6.2 56.01,35.66 58.29,35.66 LED2.K
N$11
  Bottom 0.254: T1.C 30.63,50.75 37.72,50.75 40.01,48.46 40.46,48.46 D1.A 40.69,48.46 42.98,50.75 42.98,51.89 K1.16
N$13
  Top 0.254: 56.69,15.09 49.38,7.77 48.46,7.77 OK1.2 | 56.69,15.09 58.29,15.09 D2.C | 56.69,15.09 56.69,16 56.01,16.69 55.32,16.69 51.89,20.12 50.98,20.12 R4.1
N$21  (via drill 0.61)
  Top 0.254: v39.55,40.23 42.06,37.72 42.06,36.8 42.75,36.12 46.41,36.12 50.75,31.77 50.75,28.12 R1.1
  Bottom 0.254: v39.55,40.23 38.18,41.6 29.26,41.6 25.6,45.26 25.6,45.72 U2.18
RX+  (via drill 0.61)
  Top 0.254: v56.01,49.84 56.46,49.84 60.81,45.49 60.81,44.58 K1.8 | v54.18,51.66 54.18,52.12 55.55,53.49 56.69,53.49 63.09,47.09 v65.15,47.09 | v39.09,5.03 29.26,5.03 28.8,5.49 10.06,5.49 9.14,6.4 9.14,9.14 IC2.6
  Bottom 0.254: R7.2 10.29,25.38 10.29,22.63 15.54,17.37 16.92,17.37 17.37,16.92 18.29,16.92 18.97,16.23 18.97,14.17 18.29,13.49 16.92,13.49 15.32,15.09 IC2.6 | v54.18,51.66 v56.01,49.84 | v65.15,47.09 66.29,47.09 69.04,44.35 69.04,14.17 60.35,5.49 56.92,5.49 53.72,8.69 45.26,8.69 41.6,5.03 v39.09,5.03
RX-  (via drill 0.61)
  Top 0.254: v7.54,65.61 5.71,65.61 4.8,64.69 4.8,29.03 10.06,23.77 10.06,20.34 R7.1
  Bottom 0.254: R7.1 10.29,20.12 10.29,17.6 12.57,15.32 IC2.7 | v7.54,65.61 9.37,67.44 38.41,67.44 42.98,62.87 57.15,62.87 62.41,57.61 62.41,56.69 61.04,55.32 61.04,52.12 K1.9
RXA  (via drill 0.61)
  Top 0.254: v57.38,25.83 57.38,29.72 v58.75,31.09
  Bottom 0.254: v57.38,25.83 58.29,24.92 58.29,23.77 56.01,21.49 56.01,20.34 R4.2 | v58.75,31.09 58.75,33.6 57.38,34.98 57.38,36.35 57.61,36.58 57.61,40.01 56.92,40.69 56.92,43.43 56.01,44.35 K1.6
RXK
  Top 0.254: OK1.3 50.98,7.77 51.89,7.77 52.81,8.69 57.38,8.69 58.29,7.77 D2.A
  Bottom 0.254: K1.11 56.01,51.89 57.15,51.89 62.18,46.86 64.01,46.86 64.92,45.95 64.92,45.26 65.84,44.35 66.52,44.35 68.12,42.75 68.12,18.75 58.52,9.14 58.52,7.77 D2.A
TX+
  Top 0.254: R10.2 10.06,53.49 10.06,55.09 9.14,56.01 9.14,58.75 15.09,64.69 IC4.6
  Bottom 0.254: K2.8 57.84,57.15 52.58,62.41 42.75,62.41 38.18,66.98 12.8,66.98 11.66,65.84 11.66,63.55 12.12,63.09 13.49,63.09 15.09,64.69 IC4.6
TX-  (via drill 0.61)
  Top 0.254: v22.4,52.81 21.72,52.12 19.2,52.12 14.17,47.09 14.17,45.03 13.03,43.89 12.34,43.89 11.66,44.58 11.66,46.41 10.29,47.78 10.29,48.23 R10.1 | v42.75,61.04 53.95,61.04 57.61,64.69 60.81,64.69 K2.9
  Bottom 0.254: v22.4,52.81 22.4,55.32 21.72,56.01 21.72,61.49 24,63.78 24,65.84 | 24,65.84 23.32,66.52 14.4,66.52 12.8,64.92 IC4.7 | v42.75,61.04 37.03,61.04 34.06,64.01 34.06,65.84 33.38,66.52 24.69,66.52 24,65.84
TXSNK
  Top 0.254: R8.2 12.8,53.49 12.8,55.09 14.17,56.46 14.17,58.29 16.92,61.04 41.38,61.04 42.29,61.95 53.03,61.95 55.78,64.69 K2.11
TXSRC
  Top 0.254: R9.2 56.92,22.86 58.06,21.72 66.52,21.72 68.12,23.32 68.12,54.63 63.78,58.98 57.84,58.98 56.01,57.15 K2.6
VCC  (via drill 0.61)
  Top 0.254: IC4.3 15.32,57.15 15.32,57.61 17.37,59.66 20.12,59.66 C3.1 20.34,59.66 27.66,59.66 29.03,58.29 29.03,54.18 28.8,53.95 28.8,52.35 | C7.1 65.84,62.41 63.55,64.69 D3.C | 42.52,57.84 43.2,57.15 K2.1 | 42.52,57.84 40.69,59.66 C5.1 | U2.19 22.86,46.63 28.57,52.35 28.8,52.35 | 28.8,52.35 33.15,52.35 35.66,54.86 39.55,54.86 | 39.55,54.86 40.46,55.78 D1.C 40.69,56.01 42.52,57.84 | 39.55,52.58 42.98,49.15 42.98,44.58 K1.1 | 39.55,54.86 39.55,52.58 | 39.55,52.58 38.41,52.58 34.52,48.69 34.52,45.03 29.49,40.01 29.49,37.49 28.35,36.35 28.12,36.35 26.06,34.29 U1.21 25.38,34.29 25.38,32.23 16.69,23.55 16.69,19.89 15.77,18.97 10.06,18.97 7.09,21.95 7.09,24.92 6.17,25.83 CN2.1 | C6.1 61.04,7.77 61.04,8.69 61.95,9.6 61.95,19.2 61.04,20.12 JP1.1 60.81,20.34 57.38,20.34 56.01,21.72 55.09,21.72 51.89,24.92 | 51.89,24.92 50.98,24 50.98,22.86 R9.1 | 51.89,24.92 51.89,31.55 C1.1 | 60.81,34.52 56.01,29.72 56.01,28.12 R1.2 | 60.81,34.52 60.81,35.43 LED2.A | 60.81,34.52 62.18,33.15 63.32,33.15 SV1.15 | 48.23,15.32 43.2,10.29 C4.1 | 48.23,15.32 v48.23,20.34 | 48.23,15.32 OK1.7
  Bottom 0.254: IC4.3 IC4.2 | 20.34,60.58 20.34,60.81 22.86,63.32 IC3.14 | 20.34,60.58 20.34,59.89 C3.1 | 20.34,60.58 19.66,61.27 13.26,61.27 10.29,64.24 10.29,64.69 IC4.8 | C7.1 65.84,62.18 65.84,57.38 63.55,55.09 63.55,50.98 SV1.1 63.32,50.75 59.66,50.75 54.63,55.78 44.58,55.78 43.2,57.15 K2.1 | LED1.A 61.04,40.46 61.04,35.66 LED2.A | 50.75,22.86 50.75,23.77 49.61,24.92 49.61,25.83 50.52,26.75 54.63,26.75 55.78,27.89 R1.2 | CN2.1 6.17,26.06 9.37,26.06 9.83,26.52 10.52,26.52 13.95,23.09 13.95,19.66 15.77,17.83 17.14,17.83 17.6,17.37 20.8,17.37 22.86,15.32 IC1.16 22.86,13.72 | 20.34,11.2 20.34,10.29 C2.1 | 22.86,13.72 20.34,11.2 | 20.34,11.2 14.63,11.2 10.74,15.09 10.29,15.09 IC2.8 | 22.86,13.72 25.38,11.2 34.52,11.2 35.43,10.29 42.98,10.29 C4.1 | v48.23,20.34 50.75,22.86 | 50.75,22.86 R9.1
XMIDIRX
  Top 0.254: IC2.1 10.29,7.54 11.89,5.94 28.35,5.94 29.03,6.63 29.03,14.17 28.12,15.09 IC1.14

## Text on the board
Document: P2H 1.0.0